# Altium PCB 载流板Ver0.1.PcbDoc (part 1 of 2)
Units mm, origin at the board's own origin, x right, y up, seen from the top; angles counter-clockwise.
Board outline 106 x 55 mm, 2 copper layers (Top Layer, Bottom Layer), stack 2.04 mm thick; 1 components, 4 nets, 8 pads, 2860 vias.
Unrouted connection lines stored in the file: 7.
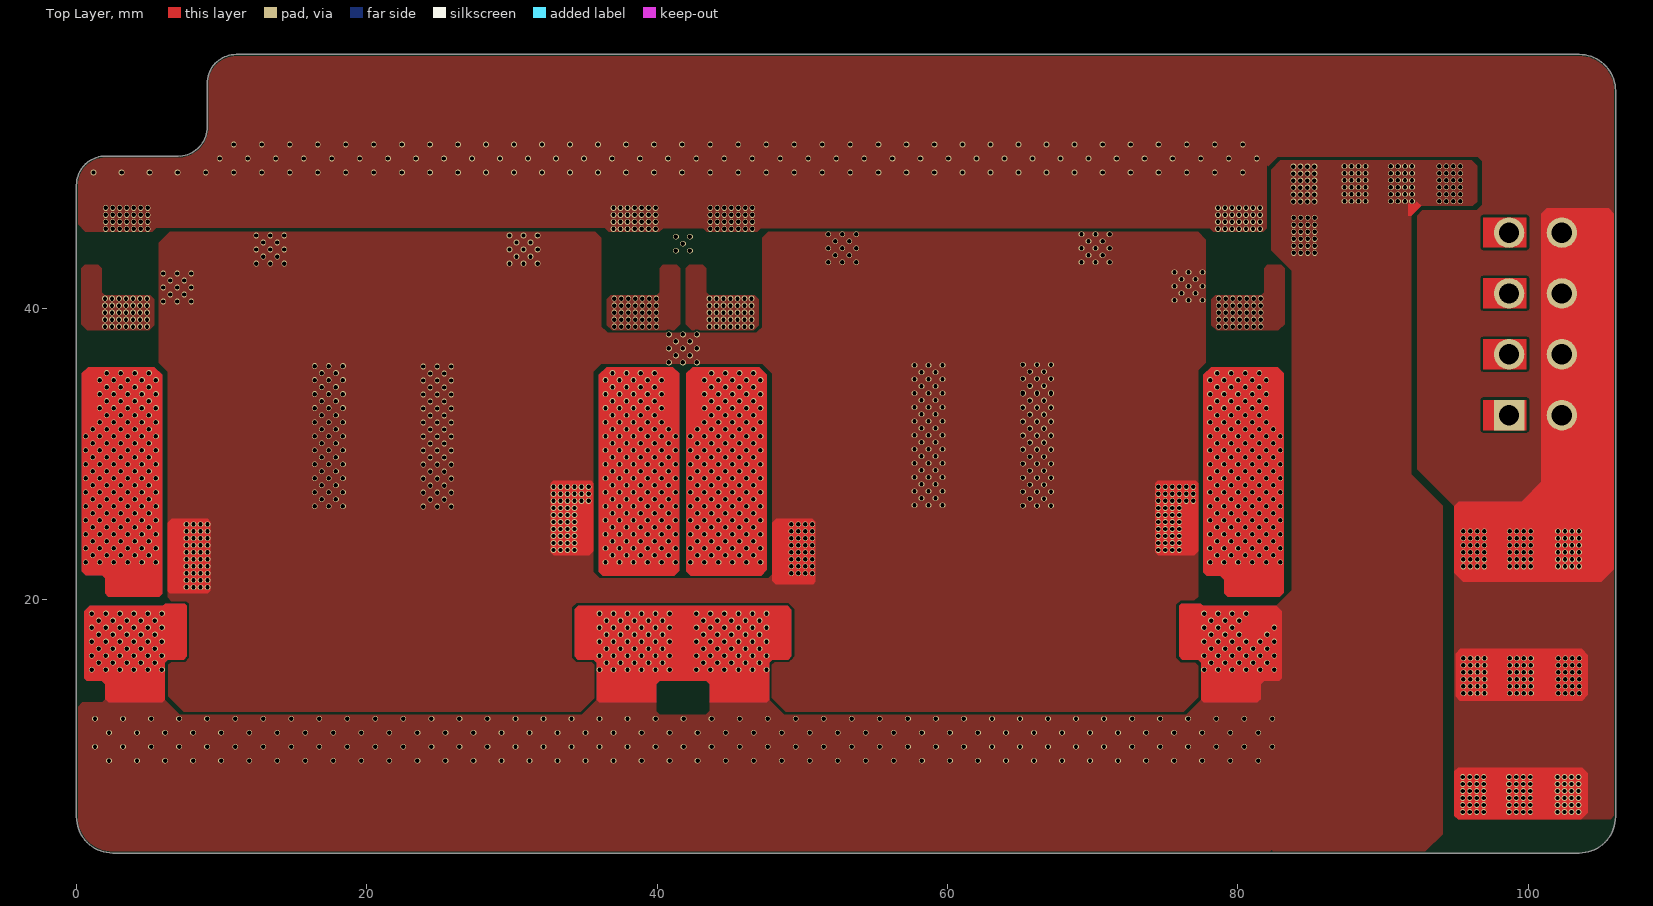
[diagram p0: Top Layer view]
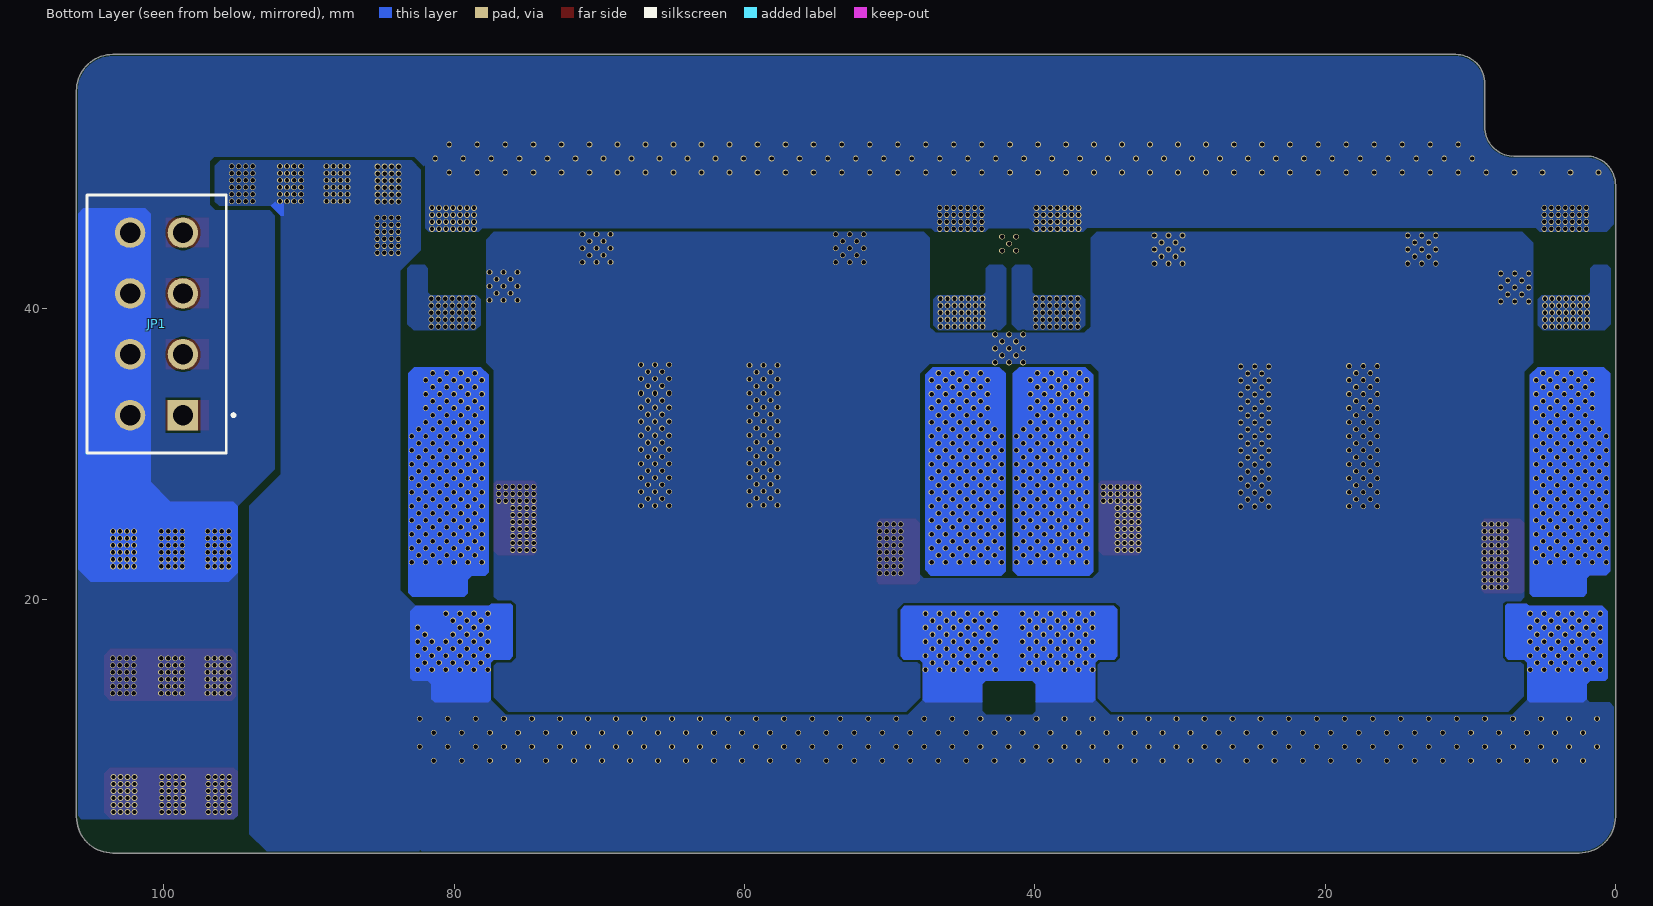
[diagram p1: Bottom Layer view, seen from below]

## Layer stack, top to bottom
Top Solder: solder mask 0.0102, Solder Resist, Dk 3.5
Top Layer: signal copper 0.07
Dielectric 1: dielectric 1.9, FR-4, Dk 4.8
Bottom Layer: signal copper 0.07
Bottom Solder: solder mask 0.0102, Solder Resist, Dk 3.5

## Board outline
0.006,5.006 0.006,48.506 cw(c2.006,48.506) 2.006,50.506 7.006,50.506 ccw(c7.006,52.506) 9.006,52.506 9.006,55.506 cw(c11.006,55.506) 11.006,57.506 103.506,57.506 cw(c103.506,55.006) 106.006,55.006 106.006,5.006 cw(c103.504,5.009) 103.506,2.506 2.506,2.506 cw(c2.507,5.007)

## Design rules (kind name [scope] priority, off if disabled: settings)
BoardOutlineClearance [All] p1: gap=0.102 ignorepadtopadclearanceinfootprint=FALSE
Clearance [All] p1: gap=0.152 ignorepadtopadclearanceinfootprint=FALSE
PolygonConnect [All] p1: connectstyle=Direct reliefconductorwidth=0.254 reliefentries=4 polygonreliefangle="90 Angle" airgapwidth=0.254
RoutingVias [All] p1: holewidth=0.3 width=0.4 viastyle="Through Hole" minholewidth=0.3 minwidth=0.4 maxholewidth=0.711 maxwidth=1.27
SolderMaskExpansion SolderMaskExpansion_VIA [isvia] p1: expansion=0.102 istentingtop=TRUE
SolderMaskExpansion [All] p2: expansion=0 istentingtop=FALSE
Width [All] p1: maxlimit=2.54 minlimit=0.127 preferedwidth=0.203
30 further rules are at their usual default settings.

## Components (designator, comment, footprint, x,y, rotation, side; value= is the part's Value field where it differs from the comment)
JP1 "Header 4X2" "4.2mm 8Pin 公头 插件" 100.491,38.95 r90 bottom locked

## Footprints (in the part's own frame and the unit in brackets; to place one, negate y for a bottom-side part, rotate by r counter-clockwise, add the part's x,y. Pads: shape width x height; smd on the part's side, far side on the other; paste and mask are expansions set on the pad)
"4.2mm 8Pin 公头 插件" [mm] "4.2mm 8Pin 公头 插件"
  rect 2.1x2.1 hole 1.4: 1(-6.285,-1.82)
  round 2.1 hole 1.4: 2(-2.095,-1.82) 3(2.095,-1.82) 4(6.285,-1.82) 5(-6.285,1.82) 6(-2.095,1.82) 7(2.095,1.82) 8(6.285,1.82)
  silkscreen extent -8.88,-5.4 8.88,4.8, body extent -8.89,-4.8 8.89,4.8, height 12.19

## Part data
JP1: "4*2P接插件", BOM名称=4*2P接插件, 学习资源=www.ooocke.com, 版权归属=源创客

## Via types
v1: diameter 0.4, hole 0.3, Top Layer to Bottom Layer, tented both sides, 2860 vias

## Nets (pads, with @x,y where several pads share a name; then routed paths per layer and width w, separated by ;. In a path a pad name is that pad's centre, name@x,y a point inside that pad or via, vN(x,y) a via of type N, cw(c..) or ccw(c..) an arc to the next point about the centre after c; other vN are vias at no path point)
PGND: JP1.1 JP1.2 JP1.3 JP1.4
  other v1: 7.584,20.813 8.066,20.813 8.549,20.813 9.032,20.813 7.584,21.295 8.066,21.295 8.549,21.295 9.032,21.295 7.584,21.778 8.066,21.778 8.549,21.778 9.032,21.778 49.234,21.778 49.717,21.778 50.199,21.778 50.682,21.778 7.584,22.26 8.066,22.26 8.549,22.26 9.032,22.26 49.234,22.26 49.717,22.26 50.199,22.26 50.682,22.26 7.584,22.743 8.066,22.743 8.549,22.743 9.032,22.743 49.234,22.743 49.717,22.743 50.199,22.743 50.682,22.743 7.584,23.226 8.066,23.226 8.549,23.226 9.032,23.226 49.234,23.226 49.717,23.226 50.199,23.226 50.682,23.226 32.864,23.379 33.346,23.379 33.829,23.379 34.312,23.379 74.515,23.379 74.997,23.379 75.48,23.379 75.962,23.379 7.584,23.708 8.066,23.708 8.549,23.708 9.032,23.708 49.234,23.708 49.717,23.708 50.199,23.708 50.682,23.708 32.864,23.861 33.346,23.861 33.829,23.861 34.312,23.861 74.515,23.861 74.997,23.861 75.48,23.861 75.962,23.861 7.584,24.191 8.066,24.191 8.549,24.191 9.032,24.191 49.234,24.191 49.717,24.191 50.199,24.191 50.682,24.191 32.864,24.344 33.346,24.344 33.829,24.344 34.312,24.344 74.515,24.344 74.997,24.344 75.48,24.344 75.962,24.344 7.584,24.673 8.066,24.673 8.549,24.673 9.032,24.673 49.234,24.673 49.717,24.673 50.199,24.673 50.682,24.673 32.864,24.827 33.346,24.827 33.829,24.827 34.312,24.827 74.515,24.827 74.997,24.827 75.48,24.827 75.962,24.827 7.584,25.156 8.066,25.156 8.549,25.156 9.032,25.156 49.234,25.156 49.717,25.156 50.199,25.156 50.682,25.156 32.864,25.309 33.346,25.309 33.829,25.309 34.312,25.309 74.515,25.309 74.997,25.309 75.48,25.309 75.962,25.309 32.864,25.792 33.346,25.792 33.829,25.792 34.312,25.792 74.515,25.792 74.997,25.792 75.48,25.792 75.962,25.792 32.864,26.274 33.346,26.274 33.829,26.274 34.312,26.274 74.515,26.274 74.997,26.274 75.48,26.274 75.962,26.274 23.891,26.365 24.856,26.365 25.821,26.365 16.423,26.39 17.388,26.39 18.353,26.39 65.191,26.427 66.156,26.427 67.121,26.427 57.723,26.453 58.689,26.453 59.654,26.453 32.864,26.757 33.346,26.757 33.829,26.757 34.312,26.757 34.794,26.757 35.277,26.757 74.515,26.757 74.997,26.757 75.48,26.757 75.962,26.757 76.445,26.757 76.928,26.757 24.373,26.847 25.338,26.847 16.906,26.873 17.871,26.873 65.674,26.91 66.639,26.91 58.206,26.935 59.171,26.935 32.864,27.24 33.346,27.24 33.829,27.24 34.312,27.24 34.794,27.24 35.277,27.24 74.515,27.24 74.997,27.24 75.48,27.24 75.962,27.24 76.445,27.24 76.928,27.24 23.891,27.33 24.856,27.33 25.821,27.33 16.423,27.355 17.388,27.355 18.353,27.355 65.191,27.393 66.156,27.393 67.121,27.393 57.723,27.418 58.689,27.418 59.654,27.418 32.864,27.722 33.346,27.722 33.829,27.722 34.312,27.722 34.794,27.722 35.277,27.722 74.515,27.722 74.997,27.722 75.48,27.722 75.962,27.722 76.445,27.722 76.928,27.722 24.373,27.813 25.338,27.813 16.906,27.838 17.871,27.838 65.674,27.875 66.639,27.875 58.206,27.901 59.171,27.901 23.891,28.295 23.891,28.295 24.856,28.295 24.856,28.295 25.821,28.295 25.821,28.295 16.423,28.321 16.423,28.321 17.388,28.321 17.388,28.321 18.353,28.321 18.353,28.321 65.191,28.358 65.191,28.358 66.156,28.358 66.156,28.358 67.121,28.358 67.121,28.358 57.723,28.383 57.723,28.383 58.689,28.383 58.689,28.383 59.654,28.383 59.654,28.383 24.373,28.778 25.338,28.778 16.906,28.803 17.871,28.803 65.674,28.84 66.639,28.84 58.206,28.866 59.171,28.866 23.891,29.26 24.856,29.26 25.821,29.26 16.423,29.286 17.388,29.286 18.353,29.286 65.191,29.323 66.156,29.323 67.121,29.323 57.723,29.348 58.689,29.348 59.654,29.348 24.373,29.743 25.338,29.743 16.906,29.768 17.871,29.768 65.674,29.806 66.639,29.806 58.206,29.831 59.171,29.831 23.891,30.226 23.891,30.226 24.856,30.226 24.856,30.226 25.821,30.226 25.821,30.226 16.423,30.251 16.423,30.251 17.388,30.251 17.388,30.251 18.353,30.251 18.353,30.251 65.191,30.288 65.191,30.288 66.156,30.288 66.156,30.288 67.121,30.288 67.121,30.288 57.723,30.314 57.723,30.314 58.689,30.314 58.689,30.314 59.654,30.314 59.654,30.314 24.373,30.708 25.338,30.708 16.906,30.734 17.871,30.734 65.674,30.771 66.639,30.771 58.206,30.796 59.171,30.796 23.891,31.191 24.856,31.191 25.821,31.191 16.423,31.216 17.388,31.216 18.353,31.216 65.191,31.253 66.156,31.253 67.121,31.253 57.723,31.279 58.689,31.279 59.654,31.279 24.373,31.673 25.338,31.673 16.906,31.699 17.871,31.699 65.674,31.736 66.639,31.736 58.206,31.761 59.171,31.761 23.891,32.156 23.891,32.156 24.856,32.156 24.856,32.156 25.821,32.156 25.821,32.156 16.423,32.181 16.423,32.181 17.388,32.181 17.388,32.181 18.353,32.181 18.353,32.181 65.191,32.219 65.191,32.219 66.156,32.219 66.156,32.219 67.121,32.219 67.121,32.219 57.723,32.244 57.723,32.244 58.689,32.244 58.689,32.244 59.654,32.244 59.654,32.244 24.373,32.639 25.338,32.639 16.906,32.664 17.871,32.664 65.674,32.701 66.639,32.701 58.206,32.727 59.171,32.727 23.891,33.121 24.856,33.121 25.821,33.121 16.423,33.147 17.388,33.147 18.353,33.147 65.191,33.184 66.156,33.184 67.121,33.184 57.723,33.209 58.689,33.209 59.654,33.209 24.373,33.604 25.338,33.604 16.906,33.629 17.871,33.629 65.674,33.666 66.639,33.666 58.206,33.692 59.171,33.692 23.891,34.086 23.891,34.086 24.856,34.086 24.856,34.086 25.821,34.086 25.821,34.086 16.423,34.112 16.423,34.112 17.388,34.112 17.388,34.112 18.353,34.112 18.353,34.112 65.191,34.149 66.156,34.149 67.121,34.149 57.723,34.174 57.723,34.174 58.689,34.174 58.689,34.174 59.654,34.174 59.654,34.174 65.191,34.2 66.156,34.2 67.121,34.2 24.373,34.569 25.338,34.569 16.906,34.594 17.871,34.594 58.206,34.657 59.171,34.657 65.674,34.682 66.639,34.682 23.891,35.052 24.856,35.052 25.821,35.052 16.423,35.077 17.388,35.077 18.353,35.077 57.723,35.14 58.689,35.14 59.654,35.14 65.191,35.165 66.156,35.165 67.121,35.165 24.373,35.534 25.338,35.534 16.906,35.56 17.871,35.56 58.206,35.622 59.171,35.622 65.674,35.648 66.639,35.648 23.891,36.017 24.856,36.017 25.821,36.017 16.423,36.042 17.388,36.042 18.353,36.042 57.723,36.105 58.689,36.105 59.654,36.105 65.191,36.13 66.156,36.13 67.121,36.13 40.807,36.296 41.772,36.296 42.737,36.296 41.29,36.779 42.255,36.779 40.807,37.261 41.772,37.261 42.737,37.261 41.29,37.744 42.255,37.744 40.807,38.227 41.772,38.227 42.737,38.227 5.984,40.487 6.949,40.487 7.914,40.487 75.63,40.575 76.596,40.575 77.561,40.575 6.466,40.97 7.431,40.97 76.113,41.058 77.078,41.058 5.984,41.452 6.949,41.452 7.914,41.452 75.63,41.54 76.596,41.54 77.561,41.54 6.466,41.935 7.431,41.935 76.113,42.023 77.078,42.023 5.984,42.418 6.949,42.418 7.914,42.418 75.63,42.506 76.596,42.506 77.561,42.506 12.384,43.103 13.35,43.103 14.315,43.103 29.834,43.103 30.799,43.103 31.765,43.103 51.78,43.191 52.745,43.191 53.71,43.191 69.23,43.191 70.195,43.191 71.16,43.191 12.867,43.586 13.832,43.586 30.317,43.586 31.282,43.586 52.262,43.674 53.228,43.674 69.712,43.674 70.677,43.674 12.384,44.069 13.35,44.069 14.315,44.069 29.834,44.069 30.799,44.069 31.765,44.069 51.78,44.157 52.745,44.157 53.71,44.157 69.23,44.157 70.195,44.157 71.16,44.157 12.867,44.551 13.832,44.551 30.317,44.551 31.282,44.551 52.262,44.639 53.228,44.639 69.712,44.639 70.677,44.639 12.384,45.034 13.35,45.034 14.315,45.034 29.834,45.034 30.799,45.034 31.765,45.034 51.78,45.122 52.745,45.122 53.71,45.122 69.23,45.122 70.195,45.122 71.16,45.122
VBUS: 
  other v1: 2.25,8.864 4.18,8.864 6.111,8.864 8.041,8.864 9.971,8.864 11.902,8.864 13.832,8.864 15.763,8.864 17.693,8.864 19.623,8.864 21.554,8.864 23.484,8.864 25.415,8.864 27.345,8.864 29.275,8.864 31.206,8.864 33.136,8.864 35.067,8.864 36.997,8.864 38.927,8.864 40.858,8.864 42.788,8.864 44.719,8.864 46.649,8.864 48.579,8.864 50.51,8.864 52.44,8.864 54.371,8.864 56.301,8.864 58.231,8.864 60.162,8.864 62.092,8.864 64.023,8.864 65.953,8.864 67.883,8.864 69.814,8.864 71.744,8.864 73.675,8.864 75.605,8.864 77.535,8.864 79.466,8.864 81.396,8.864 1.285,9.829 3.215,9.829 5.145,9.829 7.076,9.829 9.006,9.829 10.937,9.829 12.867,9.829 14.797,9.829 16.728,9.829 18.658,9.829 20.589,9.829 22.519,9.829 24.449,9.829 26.38,9.829 28.31,9.829 30.241,9.829 32.171,9.829 34.101,9.829 36.032,9.829 37.962,9.829 39.893,9.829 41.823,9.829 43.753,9.829 45.684,9.829 47.614,9.829 49.545,9.829 51.475,9.829 53.405,9.829 55.336,9.829 57.266,9.829 59.197,9.829 61.127,9.829 63.057,9.829 64.988,9.829 66.918,9.829 68.849,9.829 70.779,9.829 72.709,9.829 74.64,9.829 76.57,9.829 78.501,9.829 80.431,9.829 82.361,9.829 2.25,10.795 4.18,10.795 6.111,10.795 8.041,10.795 9.971,10.795 11.902,10.795 13.832,10.795 15.763,10.795 17.693,10.795 19.623,10.795 21.554,10.795 23.484,10.795 25.415,10.795 27.345,10.795 29.275,10.795 31.206,10.795 33.136,10.795 35.067,10.795 36.997,10.795 38.927,10.795 40.858,10.795 42.788,10.795 44.719,10.795 46.649,10.795 48.579,10.795 50.51,10.795 52.44,10.795 54.371,10.795 56.301,10.795 58.231,10.795 60.162,10.795 62.092,10.795 64.023,10.795 65.953,10.795 67.883,10.795 69.814,10.795 71.744,10.795 73.675,10.795 75.605,10.795 77.535,10.795 79.466,10.795 81.396,10.795 1.285,11.76 3.215,11.76 5.145,11.76 7.076,11.76 9.006,11.76 10.937,11.76 12.867,11.76 14.797,11.76 16.728,11.76 18.658,11.76 20.589,11.76 22.519,11.76 24.449,11.76 26.38,11.76 28.31,11.76 30.241,11.76 32.171,11.76 34.101,11.76 36.032,11.76 37.962,11.76 39.893,11.76 41.823,11.76 43.753,11.76 45.684,11.76 47.614,11.76 49.545,11.76 51.475,11.76 53.405,11.76 55.336,11.76 57.266,11.76 59.197,11.76 61.127,11.76 63.057,11.76 64.988,11.76 66.918,11.76 68.849,11.76 70.779,11.76 72.709,11.76 74.64,11.76 76.57,11.76 78.501,11.76 80.431,11.76 82.361,11.76 1.065,15.134 2.03,15.134 2.996,15.134 3.961,15.134 4.926,15.134 5.891,15.134 36.03,15.134 36.995,15.134 37.96,15.134 38.925,15.134 39.89,15.134 40.856,15.134 42.702,15.134 43.667,15.134 44.632,15.134 45.598,15.134 46.563,15.134 47.528,15.134 77.669,15.134 78.634,15.134 79.599,15.134 80.564,15.134 81.529,15.134 82.495,15.134 1.548,15.617 2.513,15.617 3.478,15.617 4.443,15.617 5.409,15.617 36.512,15.617 37.477,15.617 38.443,15.617 39.408,15.617 40.373,15.617 43.185,15.617 44.15,15.617 45.115,15.617 46.08,15.617 47.045,15.617 78.151,15.617 79.116,15.617 80.082,15.617 81.047,15.617 82.012,15.617 1.065,16.099 2.03,16.099 2.996,16.099 3.961,16.099 4.926,16.099 5.891,16.099 36.03,16.099 36.995,16.099 37.96,16.099 38.925,16.099 39.89,16.099 40.856,16.099 42.702,16.099 43.667,16.099 44.632,16.099 45.598,16.099 46.563,16.099 47.528,16.099 77.669,16.099 78.634,16.099 79.599,16.099 80.564,16.099 81.529,16.099 82.495,16.099 1.548,16.582 2.513,16.582 3.478,16.582 4.443,16.582 5.409,16.582 36.512,16.582 37.477,16.582 38.443,16.582 39.408,16.582 40.373,16.582 43.185,16.582 44.15,16.582 45.115,16.582 46.08,16.582 47.045,16.582 78.151,16.582 79.116,16.582 80.082,16.582 81.047,16.582 82.012,16.582 1.065,17.065 2.03,17.065 2.996,17.065 3.961,17.065 4.926,17.065 5.891,17.065 36.03,17.065 36.995,17.065 37.96,17.065 38.925,17.065 39.89,17.065 40.856,17.065 42.702,17.065 43.667,17.065 44.632,17.065 45.598,17.065 46.563,17.065 47.528,17.065 77.669,17.065 78.634,17.065 79.599,17.065 80.564,17.065 81.529,17.065 82.495,17.065 1.548,17.547 2.513,17.547 3.478,17.547 4.443,17.547 5.409,17.547 36.512,17.547 37.477,17.547 38.443,17.547 39.408,17.547 40.373,17.547 43.185,17.547 44.15,17.547 45.115,17.547 46.08,17.547 47.045,17.547 78.151,17.547 79.116,17.547 80.082,17.547 82.012,17.547 1.065,18.03 2.03,18.03 2.996,18.03 3.961,18.03 4.926,18.03 5.891,18.03 36.03,18.03 36.995,18.03 37.96,18.03 38.925,18.03 39.89,18.03 40.856,18.03 42.702,18.03 43.667,18.03 44.632,18.03 45.598,18.03 46.563,18.03 47.528,18.03 77.669,18.03 78.634,18.03 79.599,18.03 82.495,18.03 1.548,18.512 2.513,18.512 3.478,18.512 4.443,18.512 5.409,18.512 36.512,18.512 37.477,18.512 38.443,18.512 39.408,18.512 40.373,18.512 43.185,18.512 44.15,18.512 45.115,18.512 46.08,18.512 47.045,18.512 78.151,18.512 79.116,18.512 80.082,18.512 1.065,18.995 2.03,18.995 2.996,18.995 3.961,18.995 4.926,18.995 5.891,18.995 36.03,18.995 36.995,18.995 37.96,18.995 38.925,18.995 39.89,18.995 40.856,18.995 42.702,18.995 43.667,18.995 44.632,18.995 45.598,18.995 46.563,18.995 47.528,18.995 77.669,18.995 78.634,18.995 79.599,18.995 80.564,18.995 83.845,43.84 84.328,43.84 84.811,43.84 85.293,43.84 83.845,44.323 84.328,44.323 84.811,44.323 85.293,44.323 83.845,44.806 84.328,44.806 84.811,44.806 85.293,44.806 83.845,45.288 84.328,45.288 84.811,45.288 85.293,45.288 83.845,45.771 84.328,45.771 84.811,45.771 85.293,45.771 83.845,46.253 84.328,46.253 84.811,46.253 85.293,46.253 83.82,47.371 84.303,47.371 84.785,47.371 85.268,47.371 87.336,47.397 87.819,47.397 88.301,47.397 88.784,47.397 90.536,47.397 91.019,47.397 91.502,47.397 91.984,47.397 93.864,47.397 94.346,47.397 94.829,47.397 95.312,47.397 83.82,47.854 84.303,47.854 84.785,47.854 85.268,47.854 87.336,47.879 87.819,47.879 88.301,47.879 88.784,47.879 90.536,47.879 91.019,47.879 91.502,47.879 91.984,47.879 93.864,47.879 94.346,47.879 94.829,47.879 95.312,47.879 83.82,48.336 84.303,48.336 84.785,48.336 85.268,48.336 87.336,48.362 87.819,48.362 88.301,48.362 88.784,48.362 90.536,48.362 91.019,48.362 91.502,48.362 91.984,48.362 93.864,48.362 94.346,48.362 94.829,48.362 95.312,48.362 83.82,48.819 84.303,48.819 84.785,48.819 85.268,48.819 87.336,48.845 87.819,48.845 88.301,48.845 88.784,48.845 90.536,48.845 91.019,48.845 91.502,48.845 91.984,48.845 93.864,48.845 94.346,48.845 94.829,48.845 95.312,48.845 83.82,49.301 84.303,49.301 84.785,49.301 85.268,49.301 87.336,49.327 87.819,49.327 88.301,49.327 88.784,49.327 90.536,49.327 91.019,49.327 91.502,49.327 91.984,49.327 93.864,49.327 94.346,49.327 94.829,49.327 95.312,49.327 83.82,49.784 84.303,49.784 84.785,49.784 85.268,49.784 87.336,49.81 87.819,49.81 88.301,49.81 88.784,49.81 90.536,49.81 91.019,49.81 91.502,49.81 91.984,49.81 93.864,49.81 94.346,49.81 94.829,49.81 95.312,49.81
VOUT12V: JP1.5 JP1.6 JP1.7 JP1.8
  other v1: 95.479,5.334 95.961,5.334 96.444,5.334 96.926,5.334 98.679,5.334 99.162,5.334 99.644,5.334 100.127,5.334 102.006,5.334 102.489,5.334 102.972,5.334 103.454,5.334 95.479,5.817 95.961,5.817 96.444,5.817 96.926,5.817 98.679,5.817 99.162,5.817 99.644,5.817 100.127,5.817 102.006,5.817 102.489,5.817 102.972,5.817 103.454,5.817 95.479,6.299 95.961,6.299 96.444,6.299 96.926,6.299 98.679,6.299 99.162,6.299 99.644,6.299 100.127,6.299 102.006,6.299 102.489,6.299 102.972,6.299 103.454,6.299 95.479,6.782 95.961,6.782 96.444,6.782 96.926,6.782 98.679,6.782 99.162,6.782 99.644,6.782 100.127,6.782 102.006,6.782 102.489,6.782 102.972,6.782 103.454,6.782 95.479,7.264 95.961,7.264 96.444,7.264 96.926,7.264 98.679,7.264 99.162,7.264 99.644,7.264 100.127,7.264 102.006,7.264 102.489,7.264 102.972,7.264 103.454,7.264 95.479,7.747 95.961,7.747 96.444,7.747 96.926,7.747 98.679,7.747 99.162,7.747 99.644,7.747 100.127,7.747 102.006,7.747 102.489,7.747 102.972,7.747 103.454,7.747 95.529,13.513 96.012,13.513 96.495,13.513 96.977,13.513 98.73,13.513 99.212,13.513 99.695,13.513 100.178,13.513 102.057,13.513 102.54,13.513 103.022,13.513 103.505,13.513 95.529,13.995 96.012,13.995 96.495,13.995 96.977,13.995 98.73,13.995 99.212,13.995 99.695,13.995 100.178,13.995 102.057,13.995 102.54,13.995 103.022,13.995 103.505,13.995 95.529,14.478 96.012,14.478 96.495,14.478 96.977,14.478 98.73,14.478 99.212,14.478 99.695,14.478 100.178,14.478 102.057,14.478 102.54,14.478 103.022,14.478 103.505,14.478 95.529,14.961 96.012,14.961 96.495,14.961 96.977,14.961 98.73,14.961 99.212,14.961 99.695,14.961 100.178,14.961 102.057,14.961 102.54,14.961 103.022,14.961 103.505,14.961 95.529,15.443 96.012,15.443 96.495,15.443 96.977,15.443 98.73,15.443 99.212,15.443 99.695,15.443 100.178,15.443 102.057,15.443 102.54,15.443 103.022,15.443 103.505,15.443 95.529,15.926 96.012,15.926 96.495,15.926 96.977,15.926 98.73,15.926 99.212,15.926 99.695,15.926 100.178,15.926 102.057,15.926 102.54,15.926 103.022,15.926 103.505,15.926 95.515,22.251 95.997,22.251 96.48,22.251 96.963,22.251 98.715,22.251 99.198,22.251 99.68,22.251 100.163,22.251 102.043,22.251 102.525,22.251 103.008,22.251 103.49,22.251 95.515,22.733 95.997,22.733 96.48,22.733 96.963,22.733 98.715,22.733 99.198,22.733 99.68,22.733 100.163,22.733 102.043,22.733 102.525,22.733 103.008,22.733 103.49,22.733 95.515,23.216 95.997,23.216 96.48,23.216 96.963,23.216 98.715,23.216 99.198,23.216 99.68,23.216 100.163,23.216 102.043,23.216 102.525,23.216 103.008,23.216 103.49,23.216 95.515,23.699 95.997,23.699 96.48,23.699 96.963,23.699 98.715,23.699 99.198,23.699 99.68,23.699 100.163,23.699 102.043,23.699 102.525,23.699 103.008,23.699 103.49,23.699 95.515,24.181 95.997,24.181 96.48,24.181 96.963,24.181 98.715,24.181 99.198,24.181 99.68,24.181 100.163,24.181 102.043,24.181 102.525,24.181 103.008,24.181 103.49,24.181 95.515,24.664 95.997,24.664 96.48,24.664 96.963,24.664 98.715,24.664 99.198,24.664 99.68,24.664 100.163,24.664 102.043,24.664 102.525,24.664 103.008,24.664 103.49,24.664 2.021,45.491 2.504,45.491 2.986,45.491 3.469,45.491 3.952,45.491 4.434,45.491 4.917,45.491 36.997,45.491 37.48,45.491 37.962,45.491 38.445,45.491 38.927,45.491 39.41,45.491 39.893,45.491 43.652,45.491 44.134,45.491 44.617,45.491 45.1,45.491 45.582,45.491 46.065,45.491 46.547,45.491 78.628,45.491 79.11,45.491 79.593,45.491 80.075,45.491 80.558,45.491 81.041,45.491 81.523,45.491 2.021,45.974 2.504,45.974 2.986,45.974 3.469,45.974 3.952,45.974 4.434,45.974 4.917,45.974 36.997,45.974 37.48,45.974 37.962,45.974 38.445,45.974 38.927,45.974 39.41,45.974 39.893,45.974 43.652,45.974 44.134,45.974 44.617,45.974 45.1,45.974 45.582,45.974 46.065,45.974 46.547,45.974 78.628,45.974 79.11,45.974 79.593,45.974 80.075,45.974 80.558,45.974 81.041,45.974 81.523,45.974 2.021,46.456 2.504,46.456 2.986,46.456 3.469,46.456 3.952,46.456 4.434,46.456 4.917,46.456 36.997,46.456 37.48,46.456 37.962,46.456 38.445,46.456 38.927,46.456 39.41,46.456 39.893,46.456 43.652,46.456 44.134,46.456 44.617,46.456 45.1,46.456 45.582,46.456 46.065,46.456 46.547,46.456 78.628,46.456 79.11,46.456 79.593,46.456 80.075,46.456 80.558,46.456 81.041,46.456 81.523,46.456 2.021,46.939 2.504,46.939 2.986,46.939 3.469,46.939 3.952,46.939 4.434,46.939 4.917,46.939 36.997,46.939 37.48,46.939 37.962,46.939 38.445,46.939 38.927,46.939 39.41,46.939 39.893,46.939 43.652,46.939 44.134,46.939 44.617,46.939 45.1,46.939 45.582,46.939 46.065,46.939 46.547,46.939 78.628,46.939 79.11,46.939 79.593,46.939 80.075,46.939 80.558,46.939 81.041,46.939 81.523,46.939 1.183,49.377 3.113,49.377 5.044,49.377 6.974,49.377 8.905,49.377 10.835,49.377 12.765,49.377 14.696,49.377 16.626,49.377 18.557,49.377 20.487,49.377 22.417,49.377 24.348,49.377 26.278,49.377 28.209,49.377 30.139,49.377 32.069,49.377 34,49.377 35.93,49.377 37.861,49.377 39.791,49.377 41.721,49.377 43.652,49.377 45.582,49.377 47.513,49.377 49.443,49.377 51.373,49.377 53.304,49.377 55.234,49.377 57.165,49.377 59.095,49.377 61.025,49.377 62.956,49.377 64.886,49.377 66.817,49.377 68.747,49.377 70.677,49.377 72.608,49.377 74.538,49.377 76.469,49.377 78.399,49.377 80.329,49.377 9.87,50.342 11.8,50.342 13.731,50.342 15.661,50.342 17.591,50.342 19.522,50.342 21.452,50.342 23.383,50.342 25.313,50.342 27.243,50.342 29.174,50.342 31.104,50.342 33.035,50.342 34.965,50.342 36.895,50.342 38.826,50.342 40.756,50.342 42.687,50.342 44.617,50.342 46.547,50.342 48.478,50.342 50.408,50.342 52.339,50.342 54.269,50.342 56.199,50.342 58.13,50.342 60.06,50.342 61.991,50.342 63.921,50.342 65.851,50.342 67.782,50.342 69.712,50.342 71.643,50.342 73.573,50.342 75.503,50.342 77.434,50.342 79.364,50.342 81.295,50.342 10.835,51.308 12.765,51.308 14.696,51.308 16.626,51.308 18.557,51.308 20.487,51.308 22.417,51.308 24.348,51.308 26.278,51.308 28.209,51.308 30.139,51.308 32.069,51.308 34,51.308 35.93,51.308 37.861,51.308 39.791,51.308 41.721,51.308 43.652,51.308 45.582,51.308 47.513,51.308 49.443,51.308 51.373,51.308 53.304,51.308 55.234,51.308 57.165,51.308 59.095,51.308 61.025,51.308 62.956,51.308 64.886,51.308 66.817,51.308 68.747,51.308 70.677,51.308 72.608,51.308 74.538,51.308 76.469,51.308 78.399,51.308 80.329,51.308